# Altium PCB Omnicrom_PCB.PcbDoc
Units mil, origin at the board's own origin, x right, y up, seen from the top; angles counter-clockwise.
Board outline 3800 x 1830 mil, 2 copper layers (Top Layer, Bottom Layer); 26 components, 50 nets, 169 pads, 1 vias.
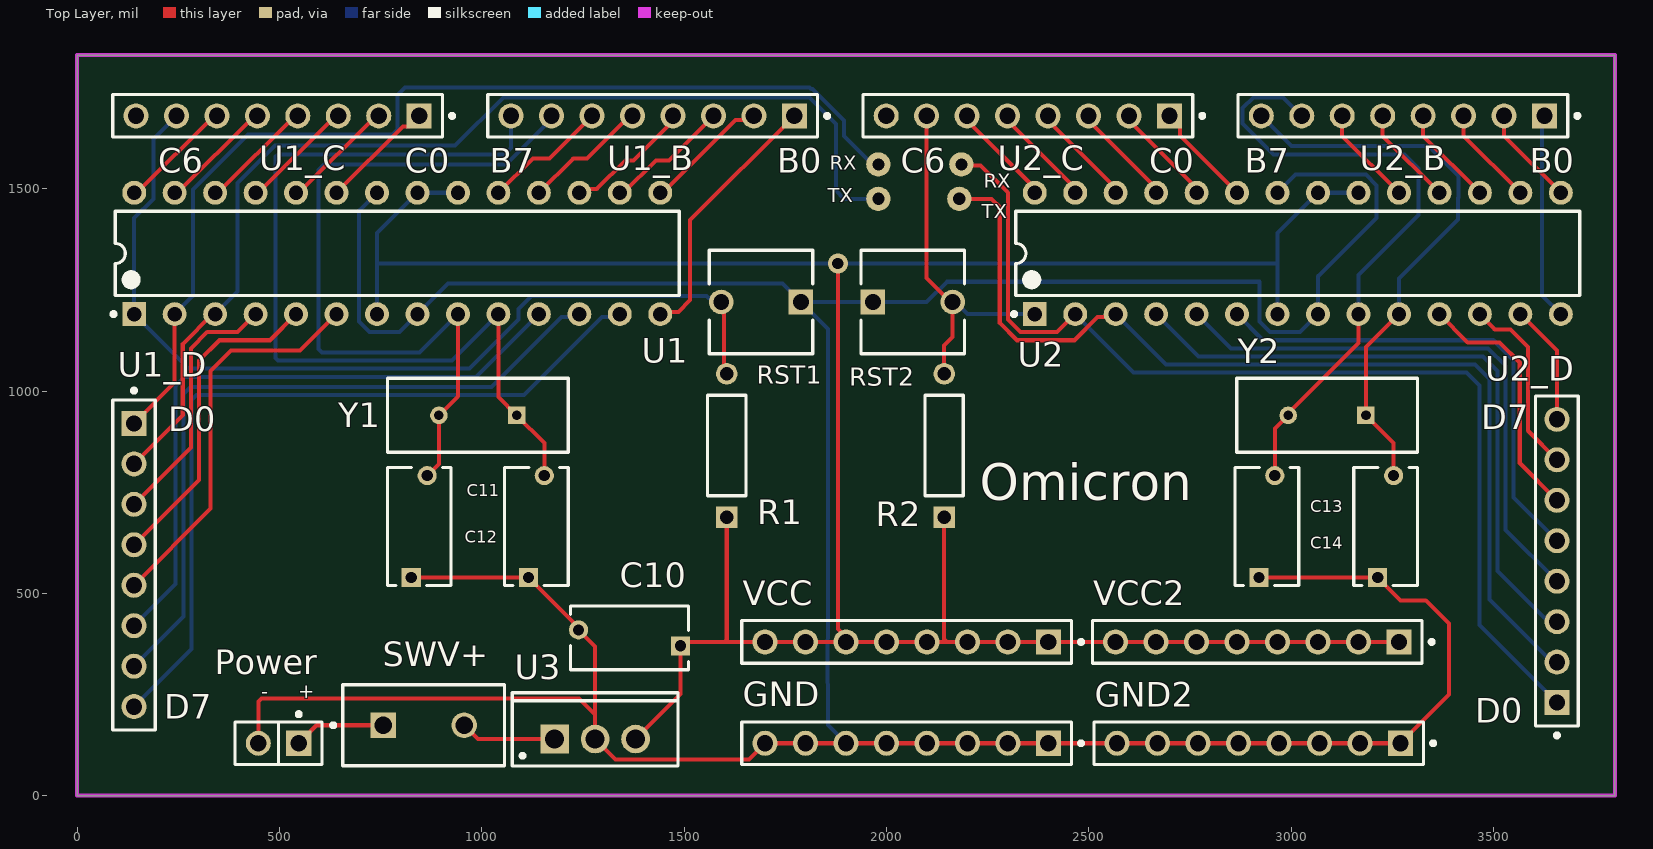
[diagram p0: Top Layer view]
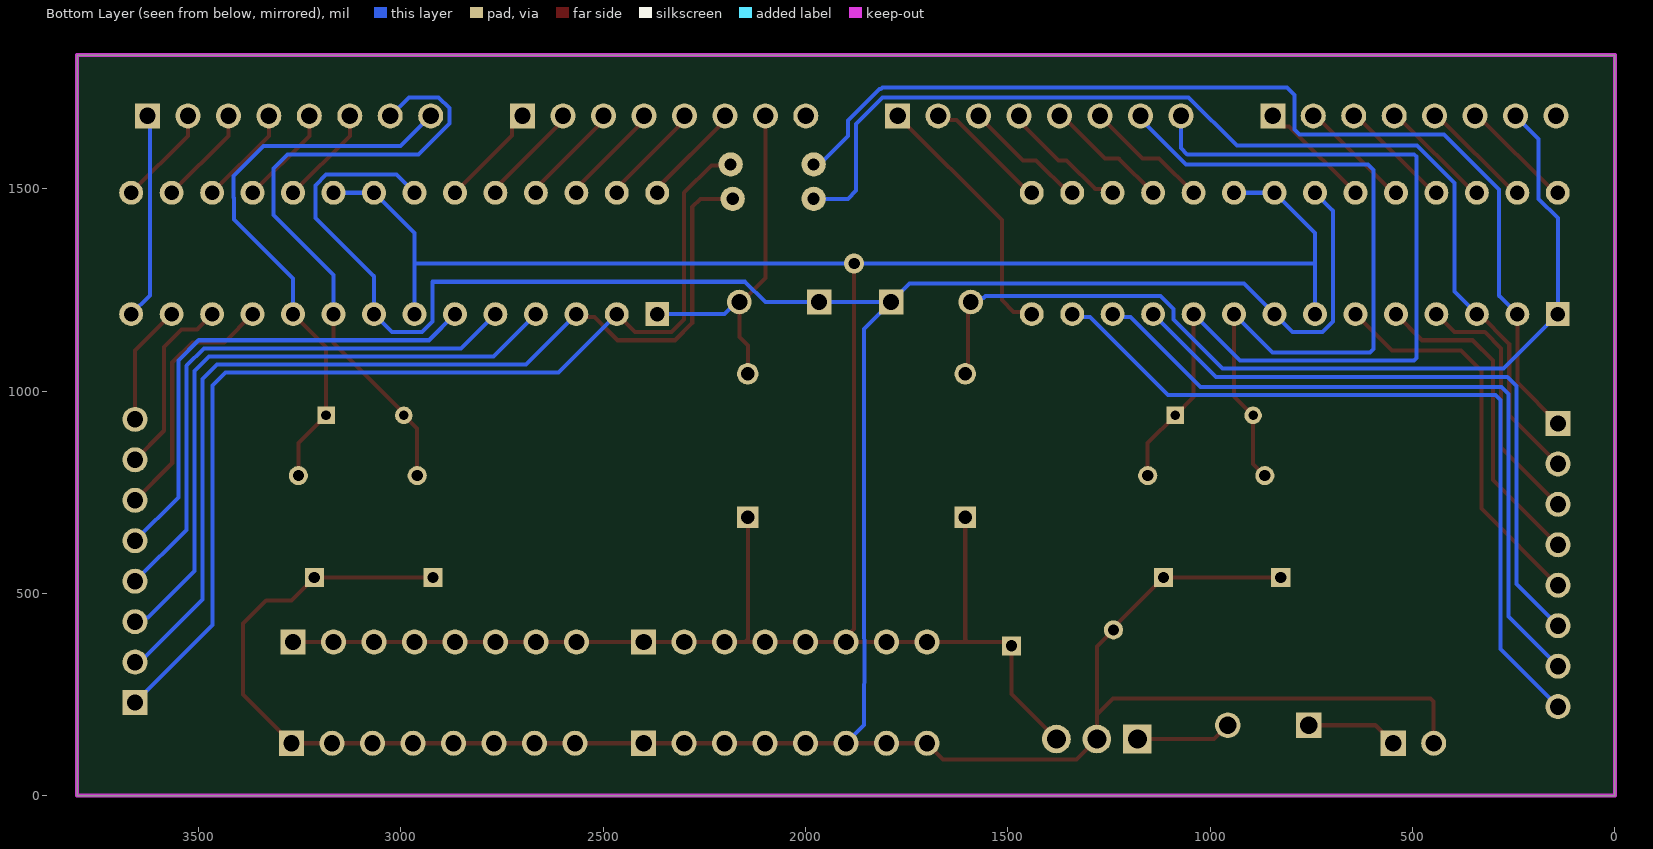
[diagram p1: Bottom Layer view, seen from below]
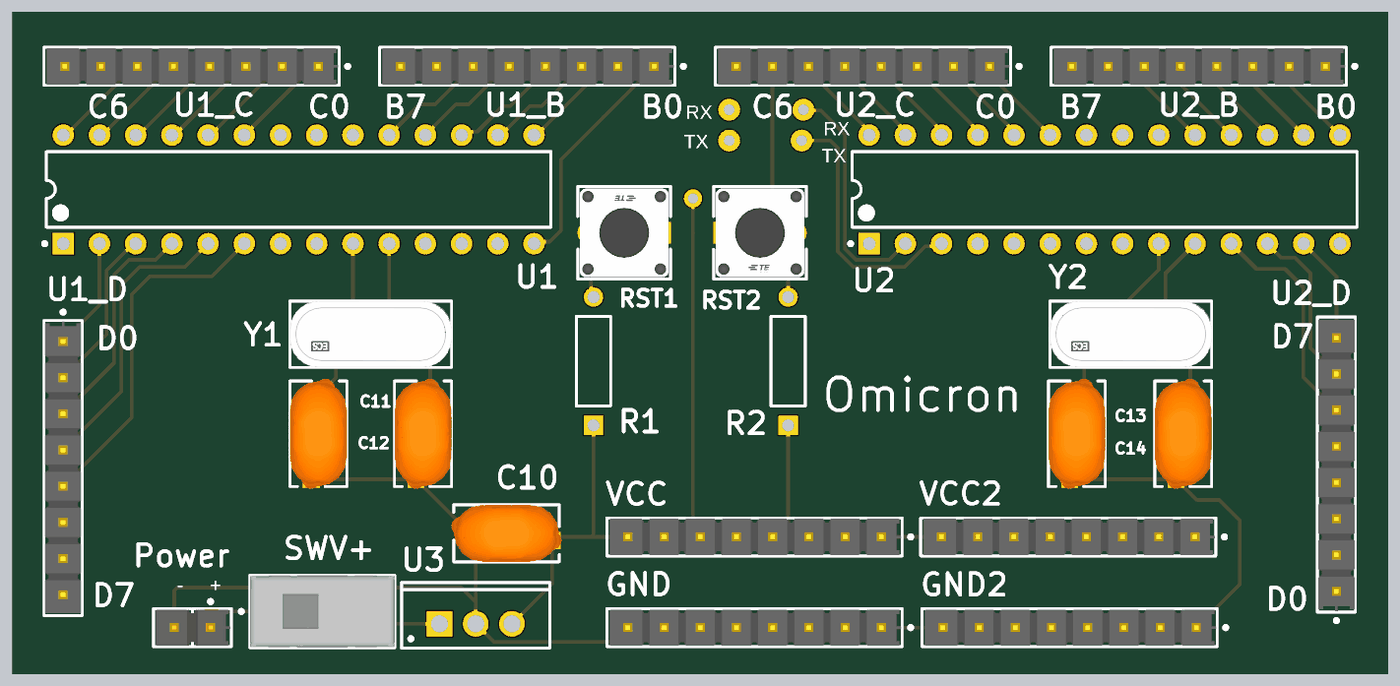
[diagram p2: 3D render of the assembled board from above, using the file's embedded part models]

## Layer stack, top to bottom
Top Solder: solder mask 0.4, Solder Resist, Dk 3.5
Top Layer: signal copper 1.4
Dielectric 1: dielectric 12.6, FR-4, Dk 4.8
Bottom Layer: signal copper 1.4
Bottom Solder: solder mask 0.4, Solder Resist, Dk 3.5

## Board outline
0,0 3800,0 3800,1830 0,1830

## Design rules (kind name [scope] priority, off if disabled: settings)
Clearance [All] p1: gap=10 ignorepadtopadclearanceinfootprint=FALSE
PolygonConnect [All] p1: connectstyle=Relief reliefconductorwidth=10 reliefentries=4 polygonreliefangle="90 Angle" airgapwidth=10
RoutingVias [All] p1: holewidth=28 width=50 viastyle="Through Hole" minholewidth=28 minwidth=50 maxholewidth=28 maxwidth=50
SolderMaskExpansion [All] p1: expansion=4 istentingtop=FALSE
SupplyNets "Schematic Supply Nets_1" [InNet('+5')] p1: voltage=0.000
SupplyNets "Schematic Supply Nets" [InNet('GND')] p2: voltage=0.000
Width [All] p1: maxlimit=10 minlimit=10 preferedwidth=10
30 further rules are at their usual default settings.

## Components (designator, comment, footprint, x,y, rotation, side; value= is the part's Value field where it differs from the comment)
C10 "" FP-561R10TSQ30-MFG 1365,390 r180 top
C11 "" FP-561R10TSQ30-MFG 845.32,665 r90 top
C12 "" FP-561R10TSQ30-MFG 1134.68,665 r90 top
C13 "" FP-561R10TSQ30-MFG 2940,665 r90 top
C14 "" FP-561R10TSQ30-MFG 3233.62,665 r90 top
GND "TSW-108-08-G-S" FP-TSW-108-08-G-S-MFG 2050,129.57 r180 top
GND2 "TSW-108-08-G-S" FP-TSW-108-08-G-S-MFG 2920,129.57 r180 top
Power "TSW-102-14-G-S" FP-TSW-102-14-G-S-MFG 497.6,129.57 r180 top
R1 "1K" RESA60-630X240 1605.25,865.39 r90 top
R2 "1K" RESA60-630X240 2142.71,865.39 r90 top
RST1 "" FP-FSM2JART-MFG 1690,1220 r180 top
RST2 "" FP-FSM2JART-MFG 2065,1220 r0 top
SWV+ "TS02CBE" CKCP-TS02CBE_V 856.42,174.05 r0 top
U1 "ATmega328P-PU" 28P3 790.98,1340 r90 top
U1_B "TSW-108-08-G-S" FP-TSW-108-08-G-S-MFG 1422.31,1680 r180 top
U1_C "TSW-108-08-G-S" FP-TSW-108-08-G-S-MFG 495.31,1680 r180 top
U1_D "TSW-108-08-G-S" FP-TSW-108-08-G-S-MFG 140.39,570 r270 top
U2 "ATmega328P-PU" 28P3 3016.46,1340 r90 top
U2_B "TSW-108-08-G-S" FP-TSW-108-08-G-S-MFG 3276.3,1680 r180 top
U2_C "TSW-108-08-G-S" FP-TSW-108-08-G-S-MFG 2349.3,1680 r180 top
U2_D "TSW-108-08-G-S" FP-TSW-108-08-G-S-MFG 3656.81,580 r90 top
U3 "L7805CP" TO220FP 1280,140 r0 top
VCC "TSW-108-08-G-S" FP-TSW-108-08-G-S-MFG 2050,380 r180 top
VCC2 "TSW-108-08-G-S" FP-TSW-108-08-G-S-MFG 2916.3,380 r180 top
Y1 "" FP-ECS-80-20-4X-MFG 990,940 r180 top
Y2 "" FP-ECS-80-20-4X-MFG 3088.94,940 r180 top

## Footprints (in the part's own frame and the unit in brackets; to place one, negate y for a bottom-side part, rotate by r counter-clockwise, add the part's x,y. Pads: shape width x height; smd on the part's side, far side on the other; paste and mask are expansions set on the pad)
28P3 [mm] "28-Pin Plastic Dual In-Line Package (PDIP)"
  rect 1.5x1.5 hole 0.9: 1(-3.81,16.51)
  round 1.5 hole 0.9: 2(-3.81,13.97) 3(-3.81,11.43) 4(-3.81,8.89) 5(-3.81,6.35) 6(-3.81,3.81) 7(-3.81,1.27) 8(-3.81,-1.27) 9(-3.81,-3.81) 10(-3.81,-6.35) 11(-3.81,-8.89) 12(-3.81,-11.43) 13(-3.81,-13.97) 14(-3.81,-16.51) 15(3.81,-16.51) 16(3.81,-13.97) 17(3.81,-11.43) 18(3.81,-8.89) 19(3.81,-6.35) 20(3.81,-3.81) 21(3.81,-1.27) 22(3.81,1.27) 23(3.81,3.81) 24(3.81,6.35) 25(3.81,8.89) 26(3.81,11.43) 27(3.81,13.97) 28(3.81,16.51)
  silkscreen extent -3.93,-17.7 2.65,17.93, body extent -3.6,-17.65 3.6,17.65, height 4.58
CKCP-TS02CBE_V [mm] "THD, 2-Leads, Body 10.16x5.08mm"
  rect 1.6x1.6 hole 1.09: 1(-2.54,0)
  round 1.6 hole 1.09: 3(2.54,0)
  silkscreen extent -5.8,-2.54 5.08,2.54, body extent -5.08,-2.54 5.08,2.54, height 12.93
FP-561R10TSQ30-MFG [mm]
  rect 1.2x1.2 hole 0.7 paste-2539.97 mask+0: 1(-3.2,0.5)
  round 1.2 hole 0.7 paste-2539.97 mask+0: 2(3.2,-0.5)
  silkscreen extent -3.7,-2 3.7,2, body extent -3.9,-2.1 3.9,2.1, height 0.25
FP-ECS-80-20-4X-MFG [mm]
  rect 1.1x1.1 hole 0.6 paste-2539.97 mask+0: 1(-2.44,0)
  round 1.1 hole 0.6 paste-2539.97 mask+0: 2(2.44,0)
  silkscreen extent -5.68,-2.32 5.68,2.32, body extent -5.77,-2.42 5.77,2.42, height 0.25
FP-FSM2JART-MFG [mil]
  rect 60.65x60.65 hole 39 paste-99999 mask+0: 1(-98.5,0)
  round 60.65 hole 39 paste-99999 mask+0: 2(98.5,0)
  silkscreen extent -128,-128 128,128, body extent -133,-132 133,132, height 10
FP-TSW-102-14-G-S-MFG [mm]
  rect 1.57x1.57 hole 1.02 paste-2539.97 mask+0: 1(-1.27,0)
  round 1.57 hole 1.02 paste-2539.97 mask+0: 2(1.27,0)
  silkscreen extent -2.73,-1.95 2.73,1.34, body extent -2.83,-1.44 2.83,1.44, height 0.25
FP-TSW-108-08-G-S-MFG [mm]
  rect 1.57x1.57 hole 1.02 paste-2539.97 mask+0: 1(-8.89,0)
  round 1.57 hole 1.02 paste-2539.97 mask+0: 2(-6.35,0) 3(-3.81,0) 4(-1.27,0) 5(1.27,0) 6(3.81,0) 7(6.35,0) 8(8.89,0)
  silkscreen extent -11.08,-1.34 10.35,1.34, body extent -10.45,-1.44 10.45,1.44, height 0.25
RESA60-630X240 [mm] "Axial Resistor, 2-Leads, Dia 2.4mm, Body Length 6.3mm"
  rect 1.35x1.35 hole 0.85: 1(-4.5,0)
  round 1.35 hole 0.85: 2(4.5,0)
  silkscreen extent -3.15,-1.2 3.15,1.2, body extent -3.15,-1.2 3.15,1.2, height 2.4
TO220FP [mm] "TO, Thru-Hole, Vertical, Heatsink Mounted; 3 In-Line Leads; Pitch 2.54 mm"
  rect 1.8x1.8 hole 1.2: 1(-2.54,0)
  round 1.8 hole 1.2: 2(0,0) 3(2.54,0)
  silkscreen extent -5.2,-1.7 5.2,2.9, body extent -5.25,-1.75 5.25,2.95, height 20

## Part data
C10 C11 C12 C13 C14: library part CMP-02417-000081-1, "CAP CER 30PF 1KV U2J RADIAL", Capacitance=30pF, Case/Package=Radial, Dielectric=U2J, Max Operating Temperature=105°C, Min Operating Temperature=-55°C, Package Quantity=500, Resistor Type=Ceramic, Temperature Coefficient=120ppm/°C, Tolerance=10%, Voltage=1kV, Application(s)="GENERAL PURPOSE", Construction=RADIAL, Contact Plating=Tin, Depth=4mm, Diameter=7.4mm, Dissipation Factor=2%, Height=0.25inch, Height - Seated (Max)=0.429inch, Lead Diameter=0.51mm, Lead Free="Lead Free", Lead Pitch=6.4mm, Lead/Base Style=Straight, Length=2inch, Mount="Through Hole", Number of Pins=2, Packaging=Bulk, Radiation Hardening=No, RoHS Compliant=Yes, Series="Cera-Mite 561R", Termination=Radial, Voltage Rating=1kV, Voltage Rating (DC)=1kV, Weight=0.01lb, Width=0.25inch
GND GND2 U1_B U1_C U1_D U2_B U2_C U2_D VCC VCC2: library part CMP-02766-000001-1, "CONN HEADER VERT 8POS 2.54MM", Manufacturer=Samtec, Temperature="-55°C to +125°C", Temperature Range High=+125°C, Temperature Range Low=-55°C, Automotive=No, Category=Conn, ComponentLink2Description=Datasheet, ComponentLink2URL=http://suddendocs.samtec.com/catalog_english/tsw_th.pdf, Conn Gender=Male, Conn Orientation=Straight, Contact Material=Gold,Nickel, Device Class L1=Connectors, Device Class L2="Headers and Wire Housings", Device Class L3=unset, Digikey Description="CONN HEADER VERT 8POS 2.54MM", Footprint Url=http://suddendocs.samtec.com/prints/tsw-xxx-xx-x-x-xx-xxx-footprint.pdf, Height=8.71mm, Lead Free=Yes, Manufacturer Part Number=TSW-108-08-G-S, Mouser Description="TSW - Samtec 2.54mm Pin Header 13.46mm Overall Pin Length 5.08mm Tail", Number Of Contacts=8, Number Of Rows=1, Octopart=https://octopart.com/tsw-108-08-g-s-samtec-272653, Package=TSW-108-08-G-S, Pitch=2.54mm, RoHS=TRUE
Power: library part CMP-02766-001740-1, "CONN HEADER VERT 2POS 2.54MM", Color=Black, Flammability Rating="UL94 V-0", Max Current Rating=7.6A, Max Operating Temperature=125°C, Max Voltage Rating (AC)=550V, Min Operating Temperature=-55°C, Package Quantity=1, Connector Type=Header, Contact Finish - Mating=GOLD, Contact Material=Bronze, Contact Mating Length=0.32inch, Contact Plating=Gold, Contact Shape=Square, Contact Type="Male Pin", Depth=2.54mm, Fastening Type=Pull, Gender=Male, Housing Color=Black, Housing Material=Polyester, Insulation Color=Black, Insulation Material=PBT, Lead Free="Lead Free", Length=5.08mm, Mount="Through Hole", Number Of Contacts=2, Number of Positions=2, Number Of Rows=1, Orientation=Straight, Packaging=Bulk, Pitch=2.54mm, Radiation Hardening=No, REACH SVHC="No SVHC", RoHS Compliant=Yes, Series=TSW, Termination=Solder, Width=2.54mm
R1 R2: library part CMP-1659-00075-1, "Axial Resistor, 1 KOhm, +/- 1%, 250 mW, -55 to 155 degC, 2-Pin THD, RoHS, Bulk", Case\Package=Axial, Max Operating Temperature="155 degC", Min Operating Temperature="-55 degC", Package Quantity=200, Power Rating="250 mW", Resistance="10 kohm", Tolerance=1%, Voltage Rating="250 V", ComponentLink1Description="Manufacturer URL", ComponentLink1URL=http://www.yageo.com/, ComponentLink2Description=Datasheet, ComponentLink2URL=http://www.yageo.com/documents/recent/Yageo%20LR_MFR_2013.pdf, DatasheetVersion=Apr-13, Length="0.248 inch", PackageDescription="2-Pin Axial Lead, Dia 2.4 mm, Body Length 6.3 mm", PackageReference=MFR-25, Packaging=Bulk, RoHSCompliant=true
RST1 RST2: library part CMP-03407-000009-1, "SWITCH TACTILE SPST-NO 0.05A 12V", Contact Current Rating=50mA, Contact Resistance=100mR, Max Operating Temperature=105°C, Max Voltage Rating (DC)=12V, Min Operating Temperature=-35°C, Operating Force=260gf, Package Quantity=1000, Actuator Length=0.7mm, Actuator Material=Resin, Actuator Type=Standard, Contact Material="Copper Alloy", Contact Plating=Silver, Current Rating=50mA, Electrical Life=100000Cycles, ELV=Compliant, Illumination Type=Non-Illuminated, Lead Free="Lead Free", Mount="Through Hole", Orientation=Straight, Packaging="Tape and Reel", REACH SVHC="No SVHC", RoHS Compliant=Yes, Series=FSMJRT, Switch Function=Off-Mom, Termination=Solder, Throw Configuration=SPST, Type=Switch, Voltage Rating (DC)=12V
SWV+: library part CMP-2000-07317-1, "Tiny Slide Switch, SPST, 20 V, -30 to 85 degC, 2-Pin THD, RoHS, Bulk", AC Voltage Rating (Max)=20V, Manufacturer="C&K Components", Operating Temp Range=-30Cto85C, Package Description="2-Pin Through Hole Device, Body 10.16 x 5.08 mm", Actuator Material=Nylon, Actuator Style=TopSlide, Contact Material=CopperAlloy, Contact Plating=Gold/Nickel, Datasheet URL=http://www.ck-components.com/media/1426/ts_12feb16.pdf, Datasheet Version=02/2016, DC Voltage Rating (Max)=20V, Housing Material=N/A/StainlessSteel, Manufacturer URL=http://www.ckswitches.com/, Mounting Style=ThroughHole, Mounting Technology=ThroughHole, Package Reference=TS02CBE, Pole Throw Configuration=SPST, Product Depth (mm)=5.08mm, Product Height (mm)=12.91mm, Product Length (mm)=10.16mm, Switch Configuration=OFFNoneON, Terminal Type=PCPins, Type=Tiny
U1 U2: library part CMP-0095-00013-2, "8-bit AVR Microcontroller, 32KB Flash, 1KB EEPROM, 2KB SRAM, 28-pin PDIP, Industrial Grade (-40°C to 85°C)", ComponentLink1Description="Manufacturer URL", ComponentLink1URL=http://www.atmel.com/, ComponentLink2Description="ATmega48A/48PA/88A/88PA/168A/168PA/328/328P Datasheet", ComponentLink2URL=http://www.atmel.com/dyn/resources/prod_documents/8271.pdf, ComponentLink3Description="ATmega48A/48PA/88A/88PA/168A/168PA/328/328P Summary", ComponentLink3URL=http://www.atmel.com/dyn/resources/prod_documents/8271S.pdf, DatasheetVersion="revD, May-2011", PackageDescription="28-lead (0.300\"/7.62mm Wide) Plastic Dual Inline Package (PDIP)", PackageReference=28P3, PackageVersion="revB, Sep-2001", RevisionNote="DatasheetVersion updated. URLs added."
U3: library part CMP-0244-00474-1, "Positive Voltage Regulator, 5V, 3-Pin TO-220FP", ComponentLink1Description="Manufacturer URL", ComponentLink1URL=http://www.st.com, ComponentLink2Description=Datasheet, ComponentLink2URL=http://www.st.com/internet/com/TECHNICAL_RESOURCES/TECHNICAL_LITERATURE/DATASHEET/CD00000444.pdf, DatasheetVersion=16/11/2011, PackageDescription="TO, Thru-Hole, Vertical, Heatsink Mounted; 3 In-Line Leads; Pitch 2.54 mm", PackageReference=TO220FP, PackageVersion=2011
Y1 Y2: library part CMP-1669-00002-3, ESR (Equivalent Series Resistance)=80Ω, Frequency=8MHz, Frequency Stability=50ppm, Frequency Tolerance=0.003%, Load Capacitance=20pF, Max Operating Temperature=70°C, Min Operating Temperature=-10°C, Height=3.5mm, Lead Free="Lead Free", Length=11.3538mm, Mount="Through Hole", NexarPartId=316504, Number of Pins=49, Packaging=Bulk, RoHS=Compliant, Schedule B="8541600025, 8541600025", Termination=Radial, Tolerance=0.003%, Width=4.65mm

## Free pads (board coordinates)
  round 60 hole 30: 2(1980,1560) 3(1980,1475) 4(2180,1475) 5(2185,1560)

## Via types
v1: diameter 50, hole 28, Top Layer to Bottom Layer, 1 vias

## Nets (pads, with @x,y where several pads share a name; then routed paths per layer and width w, separated by ;. In a path a pad name is that pad's centre, name@x,y a point inside that pad or via, vN(x,y) a via of type N, cw(c..) or ccw(c..) an arc to the next point about the centre after c; other vN are vias at no path point)
+5: C10.1 R1.1 R2.1 U1.7 U1.20 U1.21 U2.7 U2.20 U2.21 U3.3 VCC2.1 VCC2.2 VCC2.3 VCC2.4 VCC2.5 VCC2.6 VCC2.7 VCC2.8 VCC.1 VCC.2 VCC.3 VCC.4 VCC.5 VCC.6 VCC.7 VCC.8 | length 6724.6
  Top Layer w10: U3.3 1490.98,250.98 C10.1 1500.67,380 1600.33,380 ; R1.1 1605.25,384.92 1600.33,380 ; v1(1880,1315) 1880,411.76 1890,401.76 VCC.6@1890,380 ; R2.1 2142.71,387.29 2150,380 ; VCC2.1 VCC2.2 VCC2.3 VCC2.4 VCC2.5 VCC2.6 VCC2.7 VCC2.8 VCC.1 VCC.2 VCC.3 2150,380 ; 1600.33,380 VCC.8 VCC.7 VCC.6@1890,380 ; VCC.6@1890,380 VCC.6 VCC.5 VCC.4 2150,380
  Bottom Layer w10: U1.7 740.98,1315 ; U1.20 U1.21 740.98,1390 740.98,1315 ; U2.7 2966.46,1315 ; U2.20 U2.21 2966.46,1390 2966.46,1315 ; 740.98,1315 2966.46,1315
GND: C10.2 C11.1 C12.1 C13.1 C14.1 GND2.1 GND2.2 GND2.3 GND2.4 GND2.5 GND2.6 GND2.7 GND2.8 GND.1 GND.2 GND.3 GND.4 GND.5 GND.6 GND.7 GND.8 Power.2 RST1.1 RST2.1 U1.8 U1.22 U2.8 U2.22 U3.2 | length 9324.6
  Top Layer w10: Power.2 447.6,232.6 455,240 1240,240 1280,200 ; C11.1 C12.1 1239.02,415 C10.2 1280,368.7 1280,200 ; C13.1 C14.1 3270.68,482.27 3332.73,482.27 3390,425 3390,249.57 GND2.1 GND2.2 GND2.3 GND2.4 GND2.5 GND2.6 GND2.7 GND2.8 GND.1 GND.2 GND.3 GND.4 GND.5 GND.6 GND.7 GND.8 1660,89.57 1330.43,89.57 U3.2 1280,200
  Bottom Layer w10: U1.22 696.46,1445.47 696.46,1171.56 722.54,1145.47 796.46,1145.47 U1.8 916.31,1265.33 1743.17,1265.33 RST1.1 ; GND.6 1857.93,171.64 1855,174.57 1854.09,379.8 cw(c1900,380) 1855,389.07 1855,1153.5 1852.07,1156.43 RST1.1 ; U2.22 3010.98,1534.53 3184.9,1534.53 3210.98,1508.44 3210.98,1428.12 3066.46,1283.6 U2.8 3021.93,1145.47 2948.01,1145.47 2921.93,1171.56 2921.93,1270 2149.4,1270 2099.4,1220 RST2.1 RST1.1
NetC11_2: C11.2 U1.9 U1_B.7 Y1.2 | length 1895.8
  Top Layer w10: C11.2 893.94,819.92 Y1.2 940.98,987.05 U1.9
  Bottom Layer w10: U1.9 846.46,1095.47 605,1095.47 596.46,1104.02 596.46,1546.46 610,1560 1060,1560 1172.31,1672.31 U1_B.7
NetC12_2: C12.2 U1.10 U1_B.8 Y1.1 | length 2215.2
  Top Layer w10: U1.10 1040.98,985.08 Y1.1 1154.37,871.69 C12.2
  Bottom Layer w10: U1.10 926.46,1075.47 495.86,1075.47 490,1081.33 490,1579.14 495.86,1585 1056.72,1585 1072.31,1600.59 U1_B.8
NetC13_2: C13.2 U2.9 U2_B.7 Y2.2 | length 1600.9
  Top Layer w10: C13.2 2960,791.3 2960,907.13 Y2.2 2992.87,944.7 3166.46,1118.28 U2.9
  Bottom Layer w10: U2_B.7 2980.39,1725.91 2907.28,1725.91 2880.39,1699.01 2880.39,1660.99 2956.38,1585 3280,1585 3315,1550 3315,1435 3166.46,1286.46 U2.9
NetC14_2: C14.2 U2.10 U2_B.8 Y2.1 | length 1412.3
  Top Layer w10: C14.2 3253.31,871.69 Y2.1 3185,1108.54 U2.10
  Bottom Layer w10: U2_B.8 3001.3,1605 3340,1605 3413.62,1531.38 3413.62,1477.82 3412.83,1477.03 3412.83,1424.05 3266.46,1277.68 3266.46,1273.53 U2.10
NetPower_1: Power.1 SWV+.1 | length 227.2
  Top Layer w10: Power.1 592.09,174.05 SWV+.1
NetR1_2: R1.2 RST1.2 U1.1 U1_C.7 | length 2318.4
  Top Layer w10: RST1.2 1598.38,1213.12 1598.38,1049.43 R1.2
  Bottom Layer w10: U1_C.7 188.19,1622.88 188.19,1474.24 140.98,1427.03 U1.1 275.51,1055.47 969.43,1055.47 1090.98,1177.03 1090.98,1202.97 1122.54,1234.53 1459.43,1234.53 1459.9,1235 1555,1235 1560.31,1229.69 1581.81,1229.69 RST1.2
NetR2_2: R2.2 RST2.2 U2.1 U2_C.7 | length 888
  Top Layer w10: U2_C.7 2099.3,1279.2 2163.5,1215 2163.5,1133.31 2142.71,1112.52 R2.2
  Bottom Layer w10: RST2.2 2170,1220 2200,1190 U2.1
NetSWV+_3: SWV+.3 U3.1 | length 237.7
  Top Layer w10: SWV+.3 990.47,140 U3.1
NetU1_2: pad.2 U1.2 U1_D.1 | length 2573
  Top Layer w10: U1_D.1 240.98,1020.59 U1.2
  Bottom Layer w10: U1.2 286.46,1235.47 286.46,1498.44 422.11,1634.09 645.31,1634.09 779.5,1634.09 791.22,1645.82 791.22,1731.22 810,1750 1810,1750 1814.09,1745.91 1817.71,1745.91 1895,1668.62 1895,1630 pad.2@1965,1560
NetU1_3: pad.3 U1.3 U1_D.2 | length 2675.6
  Top Layer w10: U1_D.2 260.98,940.59 260.98,1115.98 335,1190 U1.3
  Bottom Layer w10: U1.3 396.46,1245.47 396.46,1513.88 489.34,1606.77 934.16,1606.77 1053.3,1725.91 1809.43,1725.91 1875,1660.33 1875,1495 1895,1475 pad.3
NetU1_4: U1.4 U1_D.3 | length 638.4
  Top Layer w10: U1_D.3 280.98,860.59 280.98,1105 321.46,1145.47 396.46,1145.47 U1.4
NetU1_5: U1.5 U1_D.4 | length 809.2
  Top Layer w10: U1_D.4 300.98,780.59 300.98,1075.13 351.33,1125.47 476.46,1125.47 U1.5
NetU1_6: U1.6 U1_D.5 | length 977.5
  Top Layer w10: U1_D.5 330,709.61 330,1050 380,1100 550.98,1100 U1.6
NetU1_11: U1.11 U1_D.6 | length 1606.3
  Bottom Layer w10: U1_D.6 243.08,522.69 243.08,1012.22 265.86,1035 985.98,1035 U1.11
NetU1_12: U1.12 U1_D.7 | length 1783.4
  Bottom Layer w10: U1_D.7 263.08,442.69 263.08,993.08 280,1010 1023.96,1010 1196.46,1182.5 1233.49,1182.5 U1.12
NetU1_13: U1.13 U1_D.8 | length 1962.9
  Bottom Layer w10: U1_D.8 283.08,362.69 283.08,978.08 295,990 1103.96,990 1296.46,1182.5 1333.49,1182.5 U1.13
NetU1_14: U1.14 U1_B.1 | length 650.1
  Top Layer w10: U1.14 1446.5,1195.51 1485.51,1195.51 1515,1225 1515,1422.69 U1_B.1
NetU1_15: U1.15 U1_B.2 | length 310
  Top Layer w10: U1.15 1447.23,1490 1627.32,1670.09 1662.4,1670.09 U1_B.2
NetU1_16: U1.16 U1_B.3 | length 310
  Top Layer w10: U1.16 1350,1490 1430,1570 1462.31,1570 U1_B.3
NetU1_17: U1.17 U1_B.4 | length 317.5
  Top Layer w10: U1.17 1250.37,1499.39 1284.02,1499.39 1354.63,1570 1375,1570 1472.31,1667.31 U1_B.4
NetU1_18: U1.18 U1_B.5 | length 310
  Top Layer w10: U1.18 1225.98,1575 1260,1575 1365,1680 U1_B.5
NetU1_19: U1.19 U1_B.6 | length 310
  Top Layer w10: U1.19 1125.98,1575 1167.31,1575 U1_B.6
NetU1_23: U1.23 U1_C.1 | length 283
  Top Layer w10: U1.23 805.08,1654.09 819.41,1654.09 U1_C.1
NetU1_24: U1.24 U1_C.2 | length 283
  Top Layer w10: U1.24 548.15,1490 738.15,1680 U1_C.2
NetU1_25: U1.25 U1_C.3 | length 283
  Top Layer w10: U1.25 448.15,1490 638.15,1680 U1_C.3
NetU1_26: U1.26 U1_C.4 | length 283
  Top Layer w10: U1.26 348.15,1490 538.15,1680 U1_C.4
NetU1_27: U1.27 U1_C.5 | length 283
  Top Layer w10: U1.27 248.15,1490 438.15,1680 U1_C.5
NetU1_28: U1.28 U1_C.6 | length 283
  Top Layer w10: U1.28 148.15,1490 338.15,1680 U1_C.6
NetU2_2: pad.5 U2.2 U2_D.1 | length 2581.8
  Top Layer w10: pad.5@2192.65,1557.65 2232.35,1557.65 2300,1490 2300,1176.19 2330.72,1145.47 2421.93,1145.47 U2.2
  Bottom Layer w10: U2.2 2610.98,1045.47 3433.67,1045.47 3465,1014.14 3465,421.81 U2_D.1
NetU2_3: pad.4 U2.3 U2_D.2 | length 2482
  Top Layer w10: pad.4@2190,1475 2260,1475 2280,1455 2280,1167.9 2322.43,1125.47 2464.9,1125.47 2521.93,1182.5 2558.96,1182.5 U2.3
  Bottom Layer w10: U2.3 2690.98,1065.47 3454.53,1065.47 3490,1030 3490,485 3645,330 U2_D.2
NetU2_4: U2.4 U2_D.3 | length 1595.1
  Bottom Layer w10: U2.4 2770.98,1085.47 3474.53,1085.47 3510,1050 3510,555 3625.09,439.91 3646.9,439.91 U2_D.3
NetU2_5: U2.5 U2_D.4 | length 1401.4
  Bottom Layer w10: U2.5 2850.98,1105.47 3487.03,1105.47 3530,1062.5 3530,656.81 U2_D.4
NetU2_6: U2.6 U2_D.5 | length 1220.4
  Bottom Layer w10: U2.6 2930.98,1125.47 3499.53,1125.47 3550,1075 3550,736.81 U2_D.5
NetU2_11: U2.11 U2_D.6 | length 626.3
  Top Layer w10: U2.11 3436.46,1120 3515,1120 3565,1070 3565,821.81 U2_D.6
NetU2_12: U2.12 U2_D.7 | length 461.4
  Top Layer w10: U2.12 3466.46,1188.54 3503.26,1151.74 3541.74,1151.74 3585,1108.49 3585,901.81 U2_D.7
NetU2_13: U2.13 U2_D.8 | length 297.4
  Top Layer w10: U2.13 3656.81,1099.65 U2_D.8
NetU2_14: U2.14 U2_B.1 | length 511.9
  Bottom Layer w10: U2_B.1 3620,1673.7 3620,1236.46 U2.14
NetU2_15: U2.15 U2_B.2 | length 248.1
  Top Layer w10: U2_B.2 3526.3,1630.16 U2.15
NetU2_16: U2.16 U2_B.3 | length 248.1
  Top Layer w10: U2_B.3 3426.3,1630.16 U2.16
NetU2_17: U2.17 U2_B.4 | length 248.1
  Top Layer w10: U2_B.4 3326.3,1630.16 U2.17
NetU2_18: U2.18 U2_B.5 | length 248.1
  Top Layer w10: U2_B.5 3226.3,1630.16 U2.18
NetU2_19: U2.19 U2_B.6 | length 248.1
  Top Layer w10: U2_B.6 3126.3,1630.16 U2.19
NetU2_23: U2.23 U2_C.1 | length 259.2
  Top Layer w10: U2_C.1 2725.21,1654.09 2725.21,1631.25 U2.23
NetU2_24: U2.24 U2_C.2 | length 259.2
  Top Layer w10: U2_C.2 2599.3,1668.58 2766.46,1501.42 U2.24
NetU2_25: U2.25 U2_C.3 | length 259.2
  Top Layer w10: U2_C.3 2499.3,1668.58 2666.46,1501.42 U2.25
NetU2_26: U2.26 U2_C.4 | length 259.2
  Top Layer w10: U2_C.4 2399.3,1668.58 2566.46,1501.42 U2.26
NetU2_27: U2.27 U2_C.5 | length 259.2
  Top Layer w10: U2_C.5 2299.3,1668.58 2466.46,1501.42 U2.27
NetU2_28: U2.28 U2_C.6 | length 259.2
  Top Layer w10: U2_C.6 2199.3,1668.58 2366.46,1501.42 U2.28
pads on no net: U1_C.8 U2_C.8

## Keep-outs
Keep-Out Layer:
  the board outline again, w10

## Silkscreen, mask and mechanical layers (free items; w line width, h text height)
Top Overlay:
  text "C6" at 200,1540 h60
  text "C0" at 810,1540 h60
  text "B7" at 1020,1540 h60
  text "B0" at 1730,1540 h60
  text "C6" at 2035,1540 h60
  text "C0" at 2650,1540 h60
  text "B7" at 2885,1540 h60
  text "B0" at 3590,1540 h60
  text "RX" at 1860,1535 h60
  text "RX" at 2240,1490 h60
  text "TX" at 1855,1454.34 h60
  text "TX" at 2235,1415 h60
  text "D7" at 3470,905 h60
  text "D0" at 225,900 h60
  text "Omicron" at 2230,730 h90
  text "-     +" at 455,228.78 h60
  text "D7" at 215,190 h60
  text "D0" at 3455,180 h60